# EAGLE board royersmd (EAGLE 7.6.0)
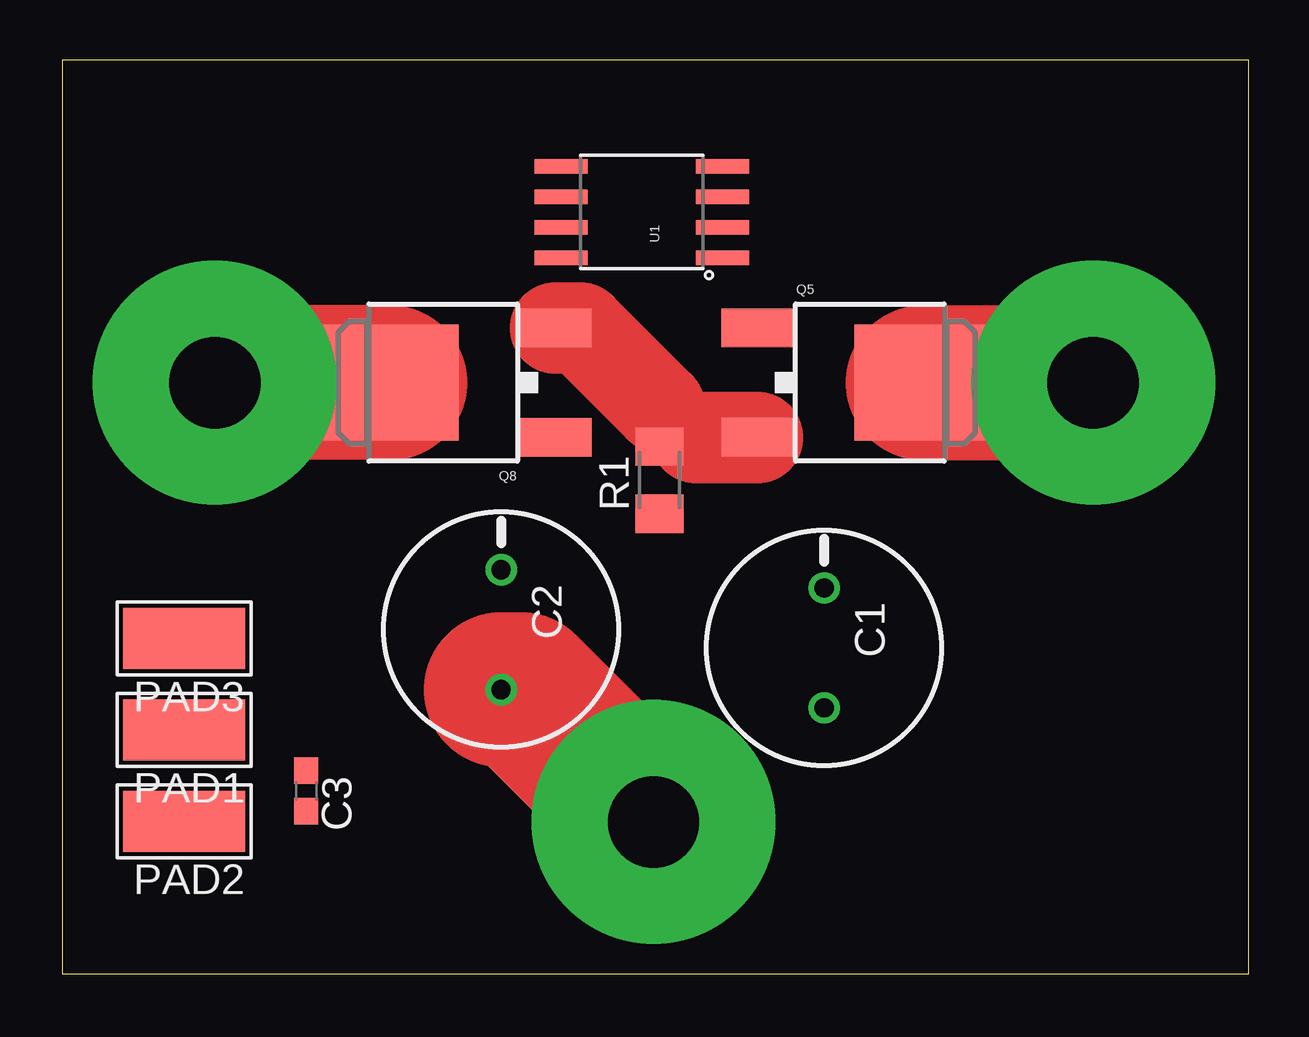
[diagram p0: board, top side]

Size 49.45 x 38.09 mm. Coordinates in mm from the lower left corner, seen from the top.
Outline: 0,0 49.45,0 49.45,38.09 0,38.09 0,0
Copper layers (1*16): Top 0.035mm / dielectric 1.5mm / Bottom 0.035mm
Design rules "default *": minimum track width 10mil, minimum drill 24mil, track to track 20mil, track to pad 20mil, pad to pad 20mil, via to via 20mil, smd to smd 20mil, copper to edge 40mil, drill to drill 8mil, minimum pad ring 10mil, minimum via ring 8mil, stop-mask expansion 4mil, vias tented up to drill 0mil, thermal gap 10mil

## Footprints (pad centres in the part's own frame; a part is rotated, then mirrored left to right if it is on the bottom)
SANYO-OSCON_9F = drill 0.8 pad 1.27: + 2.5,0; - -2.5,0
C0603 = smd 1.1 x 1: 1 -0.85,0; 2 0.85,0
5-2,5 = smd 2.54 x 5.08: 1 0,0
DPAK = smd 1.6 x 3: 1 -2.28,-5.31; 3 2.28,-5.31 | smd 4.826 x 5.715: 4 0,1.588
M1206 = smd 1.6 x 2: 1 -1.4,0; 2 1.4,0
SO08-EIAJ = smd 0.61 x 2.21: 1 -1.905,-3.378; 2 -0.635,-3.378; 3 0.635,-3.378; 4 1.905,-3.378; 5 1.905,3.353; 6 0.635,3.353; 7 -0.635,3.353; 8 -1.905,3.353

## Placement (x,y rotation side)
C1  [SANYO-OSCON_9F]  31.75,13.58 270 top
C2  [SANYO-OSCON_9F]  18.29,14.34 270 top
C3  0.1uf  [C0603]  10.16,7.62 270 top
PAD1  WIREPADSMD5-2,5  [5-2,5]  5.08,10.16 90 top
PAD2  WIREPADSMD5-2,5  [5-2,5]  5.08,6.35 90 top
PAD3  WIREPADSMD5-2,5  [5-2,5]  5.08,13.97 90 top
Q5  MOSFET-NCHANNELFDD8780  [DPAK]  34.29,24.64 270 top
Q8  MOSFET-NCHANNELFDD8780  [DPAK]  15.24,24.64 90 top
R1  [M1206]  24.89,20.57 90 top
U1  Tiny45-20-SMT  [SO08-EIAJ]  24.13,31.75 90 top

## Library data of the parts
C1-C3 R1 = rcl
PAD1-PAD3 = wirepad
Q5 Q8 = SparkFun-DiscreteSemi; PROD_ID: TRANS-09984
U1 = SparkFun-DigitalIC; PROD_ID: IC-08922

## Nets
48V: C1.+ C2.+
COIL_1: Q8.4
COIL_2: Q5.4
GATE_1: Q8.1 U1.5
GATE_2: Q5.1 U1.6
GATE_SENSE_1: Q5.3 Q8.3 R1.2 U1.2
GND: C1.- C2.- R1.1
N$1: PAD3.1 U1.7
N$3: C3.1 PAD1.1 U1.8
N$4: C3.2 PAD2.1 U1.4

## Tracks (layer width: path | path; a pad name or v marks a point on that pad's centre or on a via)
48V  (via drill 3.81 pad 10.16)
  Top 6.452: C2.+ 19.12,11.84 v24.64,6.33
COIL_1  (via drill 3.81 pad 10.16)
  Top 6.452: Q8.4 v6.35,24.64
COIL_2  (via drill 3.81 pad 10.16)
  Top 6.452: Q5.4 v42.97,24.64
GATE_SENSE_1
  Top 1.27: 24.89,23.62 R1.2 26.29,21.97 26.67,22.36
  Top 3.81: Q5.3 26.67,22.36 26.42,22.36 26.42,22.35 | Q8.3 21.6,26.92 24.89,23.62